# EAGLE board powerDistribution (EAGLE 9.5.1)
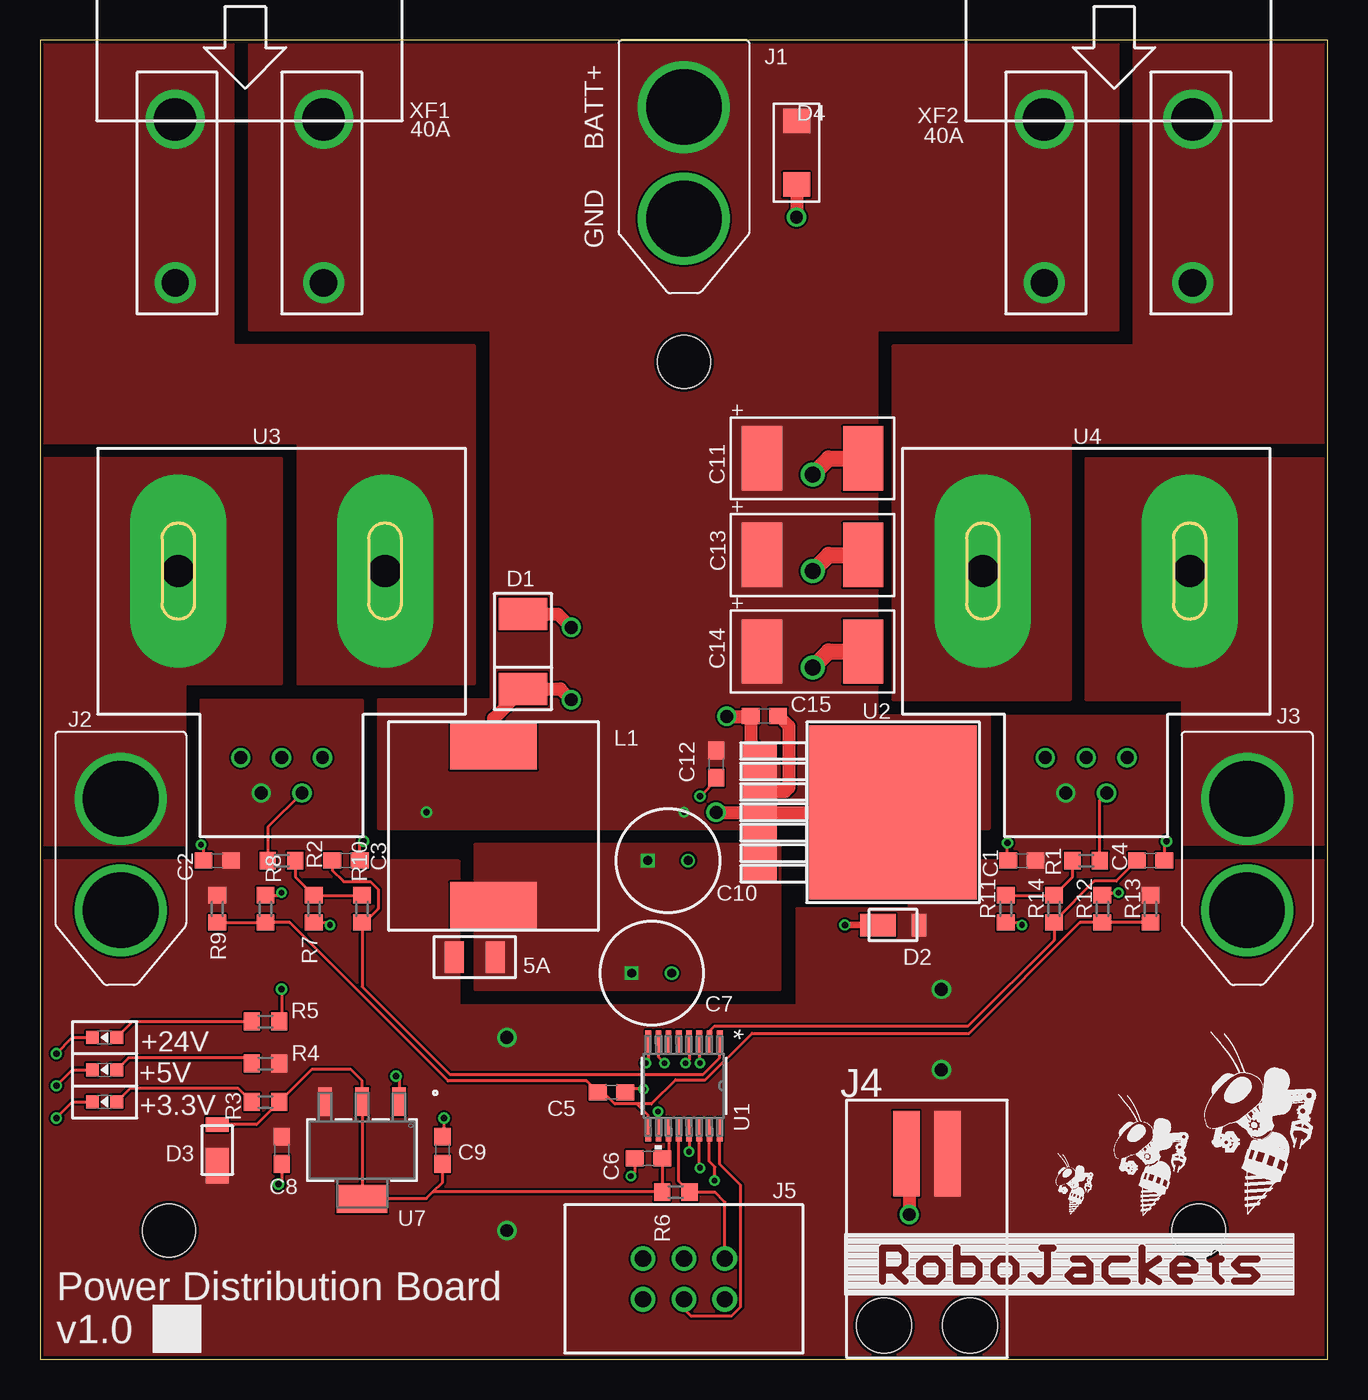
[diagram p0: board, top side]
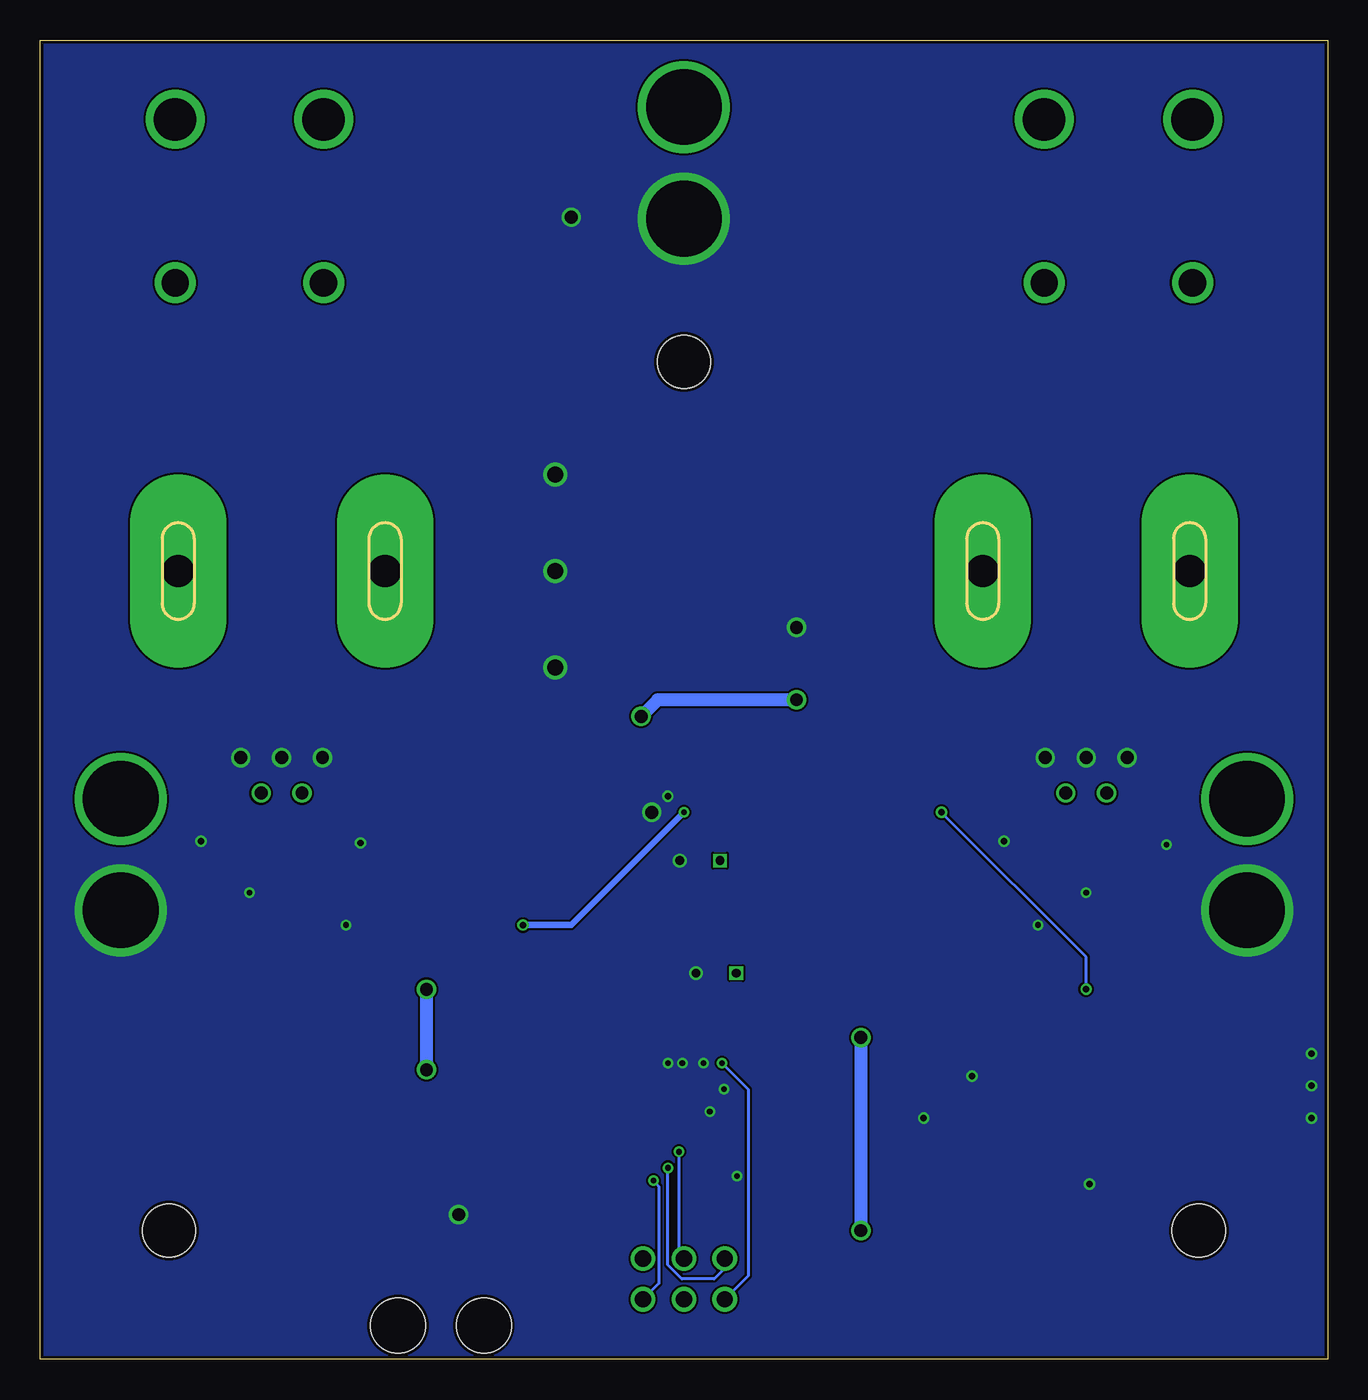
[diagram p1: board, bottom side, seen from below]

Size 80 x 82 mm. Coordinates in mm from the lower left corner, seen from the top.
Outline: 0,0 80,0 80,82 0,82 0,0
Copper layers (1+16): Top 0.035mm / dielectric 1.53mm / Bottom 0.035mm
Design rules "JLCPCB (2 Layer)": minimum track width 5mil, minimum drill 0.3mm, track to track 5mil, track to pad 5mil, pad to pad 5mil, via to via 20mil, smd to smd 5mil, copper to edge 0.2mm, drill to drill 21mil, minimum pad ring 6mil, minimum via ring 6mil, stop-mask expansion 6mil, vias tented up to drill 30mil, thermal gap 10mil
Holes 3.3 mm at 8,8 72,8 40,62

## Footprints (pad centres in the part's own frame; a part is rotated, then mirrored left to right if it is on the bottom)
CHIP-LED0603 = smd 0.8 x 0.8: A 0,-0.75; C 0,0.75
C0603 = smd 1.1 x 1: 1 -0.85,0; 2 0.85,0
860010373009 = drill 0.55 pad 0.8 square: 1 1.25,0 | drill 0.55 pad 0.8: 2 -1.25,0
TR3E156M050C0300 = smd 2.5 x 4: 1 -3.15,0; 2 3.15,0
SD2114S040S8R0 = smd 2 x 3: 1 -2.325,0; 2 2.325,0
DFLS130L-7 = smd 0.9 x 1.4: 1 1.6,0 | smd 2.2 x 1.4: 2 -0.95,0
TVSDIODE = smd 1.524 x 1.676: P$1 -1.968,0; P$2 1.968,0
ERB-RE5R00V = smd 1.168 x 1.93: 1 1.27,0; 2 -1.27,0
XT-60 = drill 4.7: BATT 0,4.154; GND 0,11.092
ESC_CONNECT = drill 4.7: ESC 0,4.154; GND 0,11.092
MOLEX_2.54MM_2PIN = smd 1.65 x 5.33: 1 1.27,10.69; 2 -1.27,10.69 | hole 3.4: -2.67,0; 2.67,0
AMPHENOL_2X3_2.54MM = drill 1.02: 1 -2.54,1.27; 2 0,1.27; 3 2.54,1.27; 4 -2.54,-1.27; 5 0,-1.27; 6 2.54,-1.27
INDUCTOR22 = smd 5.4 x 2.9: 1 0,4.95; 2 0,-4.95
R0603 = smd 1 x 1.1: 1 -0.85,0; 2 0.85,0
21-0055H_16_MXM = smd 1.46 x 0.356: 1 -2.724,2.223; 2 -2.724,1.587; 3 -2.724,0.953; 4 -2.724,0.318; 5 -2.724,-0.318; 6 -2.724,-0.953; 7 -2.724,-1.587; 8 -2.724,-2.223; 9 2.724,-2.223; 10 2.724,-1.587; 11 2.724,-0.953; 12 2.724,-0.318; 13 2.724,0.318; 14 2.724,0.953; 15 2.724,1.587; 16 2.724,2.223
TS7B = smd 0.91 x 2.16: 1 -3.81,-8.32; 2 -2.54,-8.32; 3 -1.27,-8.32; 4 0,-8.32; 5 1.27,-8.32; 6 2.54,-8.32; 7 3.81,-8.32 | smd 10.8 x 10.41: 8 0,0
974-1092-1 = drill 0.8: 1 -2.54,-11.6; 2 -1.27,-13.8; 3 0,-11.6; 4 1.27,-13.8; 5 2.54,-11.6 | drill 2 pad 6 long: 6 6.425,0; 7 -6.425,0
SOT-223 = smd 0.851 x 1.761: 1 -2.3,-3.025; 2 0,-3.025; 3 2.3,-3.025 | smd 3.151 x 1.761: 4 0,3.025
3550 = drill 1.702: 1 -4.61,-5.08; 3 4.61,-5.08 | drill 2.642: 2 -4.61,5.08; 4 4.61,5.08

## Placement (x,y rotation side)
+3.3V  Green  [CHIP-LED0603]  4,16 90 top
+5V  Green  [CHIP-LED0603]  4,18 90 top
+24V  Green  [CHIP-LED0603]  4,20 90 top
C1  0.1uF  [C0603]  61,31 180 top
C2  0.1uF  [C0603]  11,31 180 top
C3  1000pF  [C0603]  19,31 0 top
C4  1000pF  [C0603]  69,31 0 top
C5  0.1uF  [C0603]  35.5,16.6 0 top
C6  0.1uF  [C0603]  37.8,12.5 180 top
C7  180uF  [860010373009]  38,24 180 top
C8  4.7uF  [C0603]  15,13 270 top
C9  4.7uF  [C0603]  25,13 90 top
C10  180uF  [860010373009]  39.01,31 180 top
C11  15uF  [TR3E156M050C0300]  48,56 0 top
C12  0.47uF  [C0603]  42,37 270 top
C13  15uF  [TR3E156M050C0300]  48,50 0 top
C14  15uF  [TR3E156M050C0300]  48,44 0 top
C15  100nF  [C0603]  45,40 180 top
D1  SD2114S040S8R0  [SD2114S040S8R0]  30,44 270 top
D2  30  [DFLS130L-7]  53,27 0 top
D3  30  [DFLS130L-7]  11,13 90 top
D4  TVSDIODE  [TVSDIODE]  47,75 90 top
F1  5A  [ERB-RE5R00V]  27,25 0 top
J1  XT-60BATT_LABEL  [XT-60]  40,82 180 top
J2  [ESC_CONNECT]  5,39 180 top
J3  [ESC_CONNECT]  75,39 180 top
J4  MOLEX_2.54MM_2PIN  [MOLEX_2.54MM_2PIN]  55.1,2.1 0 top
J5  AMPHENOL_2X3_2.54MM  [AMPHENOL_2X3_2.54MM]  40,5 180 top
L1  22uH  [INDUCTOR22]  28.17,33.16 0 top
R1  20k  [R0603]  65,31 180 top
R2  20k  [R0603]  15,31 0 top
R3  100  [R0603]  14,16 0 top
R4  200  [R0603]  14,18.39 0 top
R5  1200  [R0603]  14,21 0 top
R6  1k  [R0603]  39.5,10.4 180 top
R7  39k  [R0603]  17,28 90 top
R8  39k  [R0603]  14,28 90 top
R9  20k  [R0603]  11,28 90 top
R10  100  [R0603]  20,28 90 top
R11  39k  [R0603]  60,28 90 top
R12  39k  [R0603]  66,28 90 top
R13  20k  [R0603]  69,28 90 top
R14  100  [R0603]  63,28 90 top
U1  MAX11635EEE+  [21-0055H_16_MXM]  40,17 270 top
U2  LM2678SX-5.0/NOPB  [TS7B]  53,34 270 top
U3  CQ2065  [974-1092-1]  15,49 0 top
U4  CQ2065  [974-1092-1]  65,49 0 top
U7  AP2114H-3.3TRG1  [SOT-223]  20,13 180 top
U$1  [ROBOJACKETS]  50,4 0 top
U$2  [ROBOBUZZ_0.2X]  64,9 0 top
U$4  [ROBOBUZZ_0.4X]  68.5,8.9 0 top
U$5  [ROBOBUZZ_0.6X]  75,9 0 top
XF1  40A  [3550]  13,72 0 top
XF2  40A  [3550]  67,72 0 top

## Library data of the parts
+3.3V +5V +24V = RoboJackets-LEDs
C1-C6 C8 C9 C12 C15 = rcl; SPICEPREFIX: C
C7 C10 C11 C13 C14 D1 D4 F1 J2-J5 L1 U2-U4 XF1 XF2 = CurrentSensing
D2 D3 = Kirbi_ControlBoard; DKPN: DFLS130LDICT-ND
J1 = RoboJackets-Connectors
R1-R14 = rcl; SPICEPREFIX: R
U1 = CurrentSensing; BUILT_BY: EMA_UL_Team; MANUFACTURER_PART_NUMBER: MAX11635EEE+; SOURCELIBRARY: Maxim_2014-05-21; VENDOR: Maxim Integrated Products
U7 = Gucci_ControlBoard; MANUFACTURER_PART_NUMBER: AP2114H3.3TRG1; VENDOR: Diodes Inc
U$1 U$2 U$4 U$5 = RoboJackets-Aesthetics

## Nets
!CS!: J5.4 R6.1 U1.12
!EOC!: J5.2 U1.16
!START!: J5.3 U1.8
+3V3: C6.1 C9.1 D3.1 R3.2 R6.2 U1.11 U7.2 U7.4
+5V: C1.1 C2.1 C8.1 D2.1 D3.2 F1.2 J4.1 R4.2 R9.2 R13.2 U3.2 U4.2 U7.3
+24V: C11.1 C12.1 C13.1 C14.1 D2.2 D4.P$2 J1.BATT R5.2 U2.2 XF1.3 XF1.4 XF2.1 XF2.2
GND: +3.3V.C +5V.C +24V.C C1.2 C2.2 C3.2 C4.2 C5.2 C6.2 C7.2 C8.2 C9.2 C10.2 C11.2 C12.2 C13.2 C14.2 D1.1 D4.P$1 J1.GND J2.GND J3.GND J4.2 R7.1 R8.2 R11.1 R12.2 U1.3 U1.4 U1.7 U1.10 U2.4 U2.8 U3.1 U3.3 U3.5 U4.1 U4.3 U4.5 U7.1
I1: U3.6 XF1.1 XF1.2
I2: U4.7 XF2.3 XF2.4
L_ESC: J2.ESC U3.7
L_MOTOR: C3.1 R10.1 U1.1
MISO: J5.1 U1.15
MOSI: J5.6 U1.14
N$1: R1.1 U4.4
N$2: R2.2 R7.2 R10.2
N$3: R2.1 U3.4
N$4: R1.2 R11.2 R14.2
N$5: +3.3V.A R3.1
N$6: C15.2 D1.2 L1.1 U2.1
N$7: C15.1 U2.3
N$8: +5V.A R4.1
N$9: +24V.A R5.1
N$10: C7.1 C10.1 F1.1 L1.2 U2.6
R_ESC: J3.ESC U4.6
R_MOTOR: C4.1 R14.1 U1.2
SCLK: J5.5 U1.13
VREF: C5.1 R8.1 R9.1 R12.1 R13.1 U1.9

## Tracks (layer width: path | path; a pad name or v marks a point on that pad's centre or on a via)
!CS!
  Top 0.2: U1.12 39.68,11.07 R6.1 41.91,10.4 42.54,9.77 J5.4
!EOC!
  Top 0.2: U1.16 42.22,12.13 43.53,10.82 43.53,3.26 42.95,2.68 40.45,2.68 40,3.13 J5.2
!START!  (via drill 0.35)
  Top 0.2: U1.8 37.78,18.55 v37.63,18.4
  Bottom 0.2: v37.63,18.4 36,16.77 36,5.2 J5.3
+3V3
  Top 0.2: U7.4 20.01,9.99 | 20.01,9.99 20.02,10 24,10 24.4,10.4 | 24.4,10.4 25,11 C9.1 | 20.01,9.99 20.01,16.01 U7.2 20,17.31 19.3,18.01 16.86,18.01 R3.2 13.45,14.6 D3.1 | U1.11 39.05,12.9 C6.1 R6.2 24.4,10.4
+5V  (via drill 0.8)
  Bottom 0.813: v56,23 v56,18 | v29,20 v29,8
  pour Top (no thermals): 0,31 26,31 26,22 54,22 54,31 80,31 80,0 0,0
  pour Top (no thermals): 10,30 10,41 20,41 20,30
  pour Top (no thermals): 60,40 70,40 70,30 60,30
  pour Top (no thermals): 47,28 47,21 55,21 55,28
+24V  (via drill 0.35, 0.4)
  Top 0.2: v15,23 15,21.15 R5.2
  Top 0.4: D2.2 v50,27
  Bottom 0.2: v15,23 15,25 v24,34
  Bottom 0.4: v50,27 47,27 v40,34
  pour Top (no thermals): 13,82 13,64 28,64 28,41 21,41 21,33 59,33 59,40 52,40 52,64 67,64 67,82
GND  (via drill 0.35, 0.4, 0.8, 1)
  Top 0.2: C9.2 25.1,13.95 v25.1,15 | C8.2 15,11.1 v14.8,10.9 | v22.1,17.6 22.3,17.4 U7.1 | C12.2 42,36 v41,35 | v1,15 2,16 +3.3V.C | v1,17 2,18 +5V.C | v1,19 2,20 +24V.C | C3.2 19.85,31.95 v20.1,32.2 | C1.2 60.1,31.05 v60.1,32.1 | C4.2 69.85,32.05 v70,32.2 | C6.2 36.95,11.65 v36.7,11.4 | U1.10 38.41,15.37 v38.39,15.39 | U1.7 38.41,18.79 v38.79,18.41 | U1.3 40.95,18.45 v41,18.4 | U1.4 40.32,18.62 v40.1,18.4 | R8.2 14.85,28.85 v15,29 | R7.1 17.85,27.15 v18,27 | C2.2 10.15,31.85 v10,32 | v37.5,16.8 36.55,16.8 C5.2 | R12.2 66.15,29 v67,29 | R11.1 60.85,27.15 v61,27
  Top 0.8: D4.P$1 v47,71
  Top 0.813: v42,34 U2.4 U2.8 | D1.1 32.17,46.33 v33,45.5 | J4.2 54,12.62 v54,9
  Top 1: v48,55 49,56 C11.2 | v48,49 49,50 C13.2 | v48,43 49,44 C14.2
  pour Bottom (no thermals): 0,0 80,0 80,82 0,82
I1
  pour Top (no thermals): 16,42 27,42 27,63 12,63 12,82 0,82 0,57 16,57
I2
  pour Top (no thermals): 80,82 80,57 64,57 64,41 53,41 53,63 68,63 68,82
L_ESC
  pour Top (no thermals): 0,32 9,32 9,42 15,42 15,56 0,56
L_MOTOR
  Top 0.2: R10.1 20,27 | 20,27 20,23.15 25.45,17.7 41.2,17.7 42.22,18.72 U1.1 | C3.1 18.15,30.4 18.85,29.7 20.52,29.7 21,29.22 21,28 20,27
MISO  (via drill 0.35)
  Top 0.2: U1.15 41.59,12.3 41.93,11.96 41.93,11.13 v41.9,11.1
  Bottom 0.2: v41.9,11.1 41.55,10.75 41.55,4.72 J5.1
MOSI  (via drill 0.35)
  Top 0.2: v41,11.9 40.95,11.95 U1.14
  Bottom 0.2: J5.6 37.46,5.67 38.13,5 40.13,5 41,5.87 v41,11.9
N$1
  Top 0.2: R1.1 65.85,34.78 U4.4
N$2
  Top 0.2: R2.2 15.85,30 R7.2 R10.2
N$3
  Top 0.2: U3.4 14.15,33.08 R2.1
N$4
  Top 0.2: R11.2 R14.2 64.15,30 R1.2
N$5
  Top 0.2: R3.1 12.32,16.83 5.58,16.83 +3.3V.A
N$6  (via drill 0.8)
  Top 0.813: L1.1 28.17,39.84 D1.2 32.33,41.67 v33,41 | U2.1 44.15,38.34 C15.2 44.12,39.97 v42.66,39.97
  Bottom 0.813: v33,41 41.63,41 v42.66,39.97
N$7
  Top 0.813: C15.1 45.88,40 46.52,39.36 46.52,35.52 46.27,35.27 U2.3
N$8
  Top 0.2: +5V.A 5.5,18.75 12.79,18.75 R4.1
N$9
  Top 0.2: +24V.A 5.75,21 R5.1
N$10
  pour Top (no thermals): 27,23 46,23 46,32 27,32
R_ESC
  pour Top (no thermals): 65,56 80,56 80,32 71,32 71,41 65,41
R_MOTOR
  Top 0.2: C4.1 66.88,29.73 65.51,29.73 63,27.22 R14.1 63,26.05 57.65,20.7 41.9,20.7 41.59,20.39 U1.2
SCLK  (via drill 0.35)
  Top 0.2: U1.13 v40.32,12.9 v40.31,12.9
  Bottom 0.2: v40.31,12.9 40.31,6.58 J5.5
VREF
  Top 0.2: R9.1 R8.1 15.5,27.15 25.35,17.3 33.95,17.3 C5.1 34.98,16.6 35.71,15.87 37.08,15.87 | U1.9 37.78,15.18 37.08,15.87 | R13.1 R12.1 64.6,27.15 57.73,20.27 44.24,20.27 41.34,17.37 39.48,17.37 37.98,15.87 37.08,15.87

## Text on the board
tPlace: D4 | 40A | 40A | 5A | Power Distribution Board / v1.0
tSilk: RoboWrestling 2020 / v1.0